# Altium PCB IO板.pcbdoc (part 1 of 2)
Units mil, origin at the board's own origin, x right, y up, seen from the top; angles counter-clockwise.
Board outline 8682.68 x 4967.05 mil, 2 copper layers (Top Layer, Bottom Layer); 114 components, 269 nets, 754 pads, 560 vias.
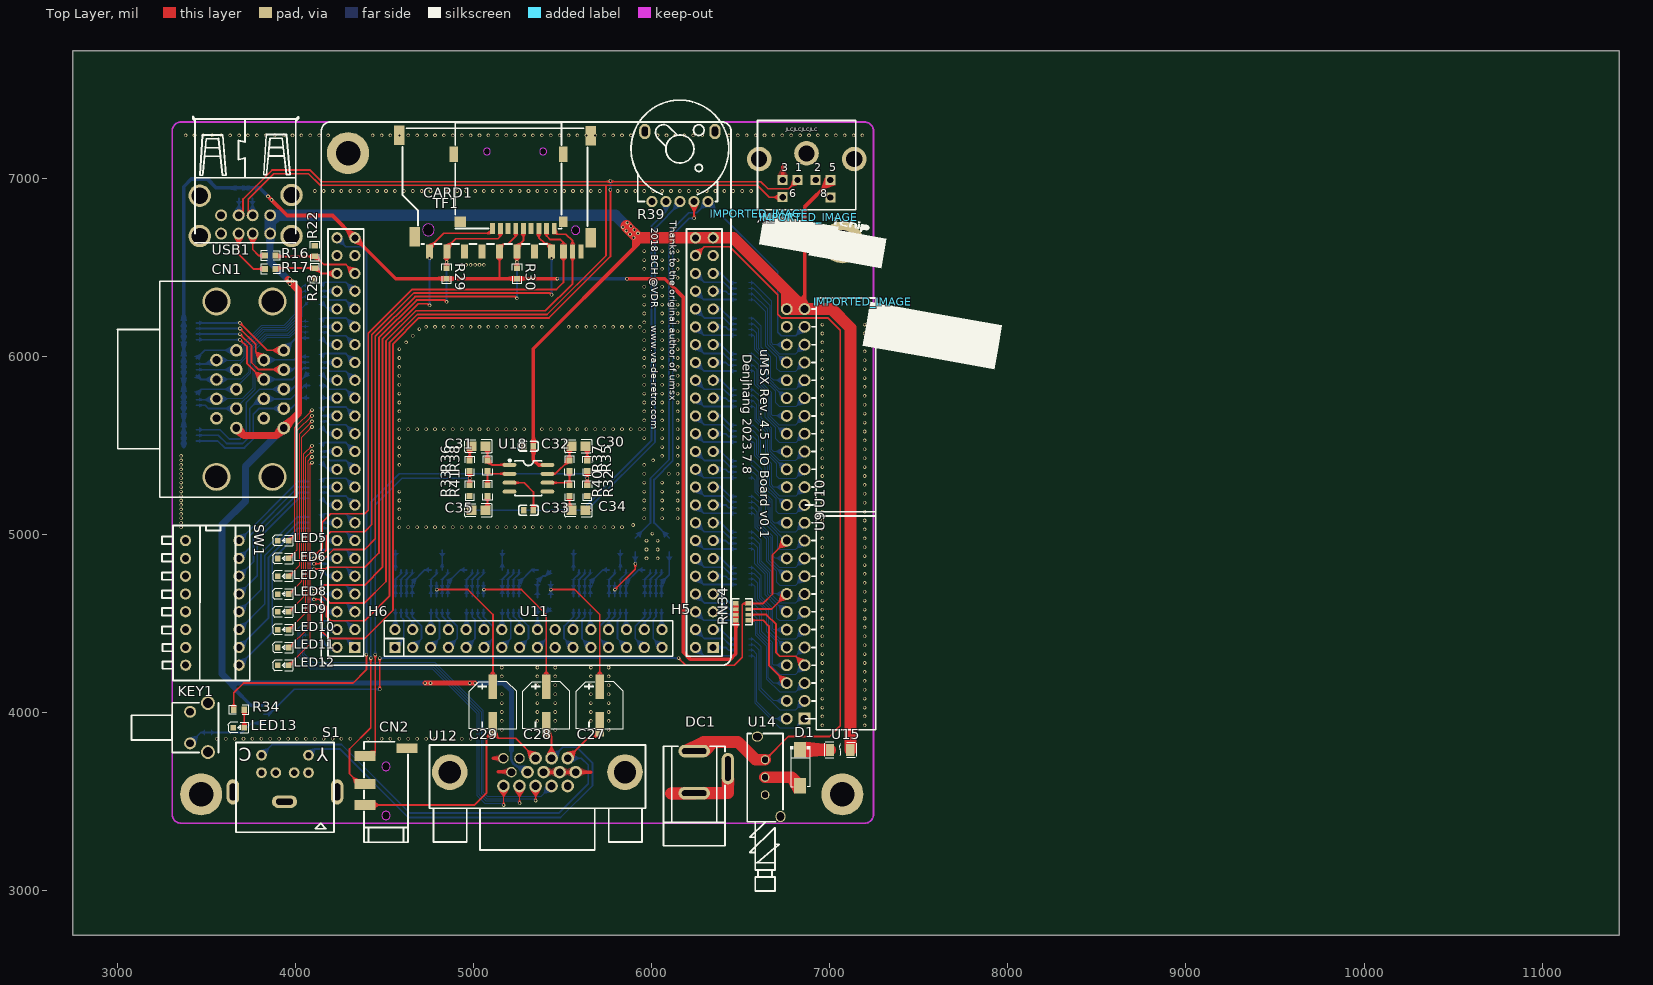
[diagram p0: Top Layer view]
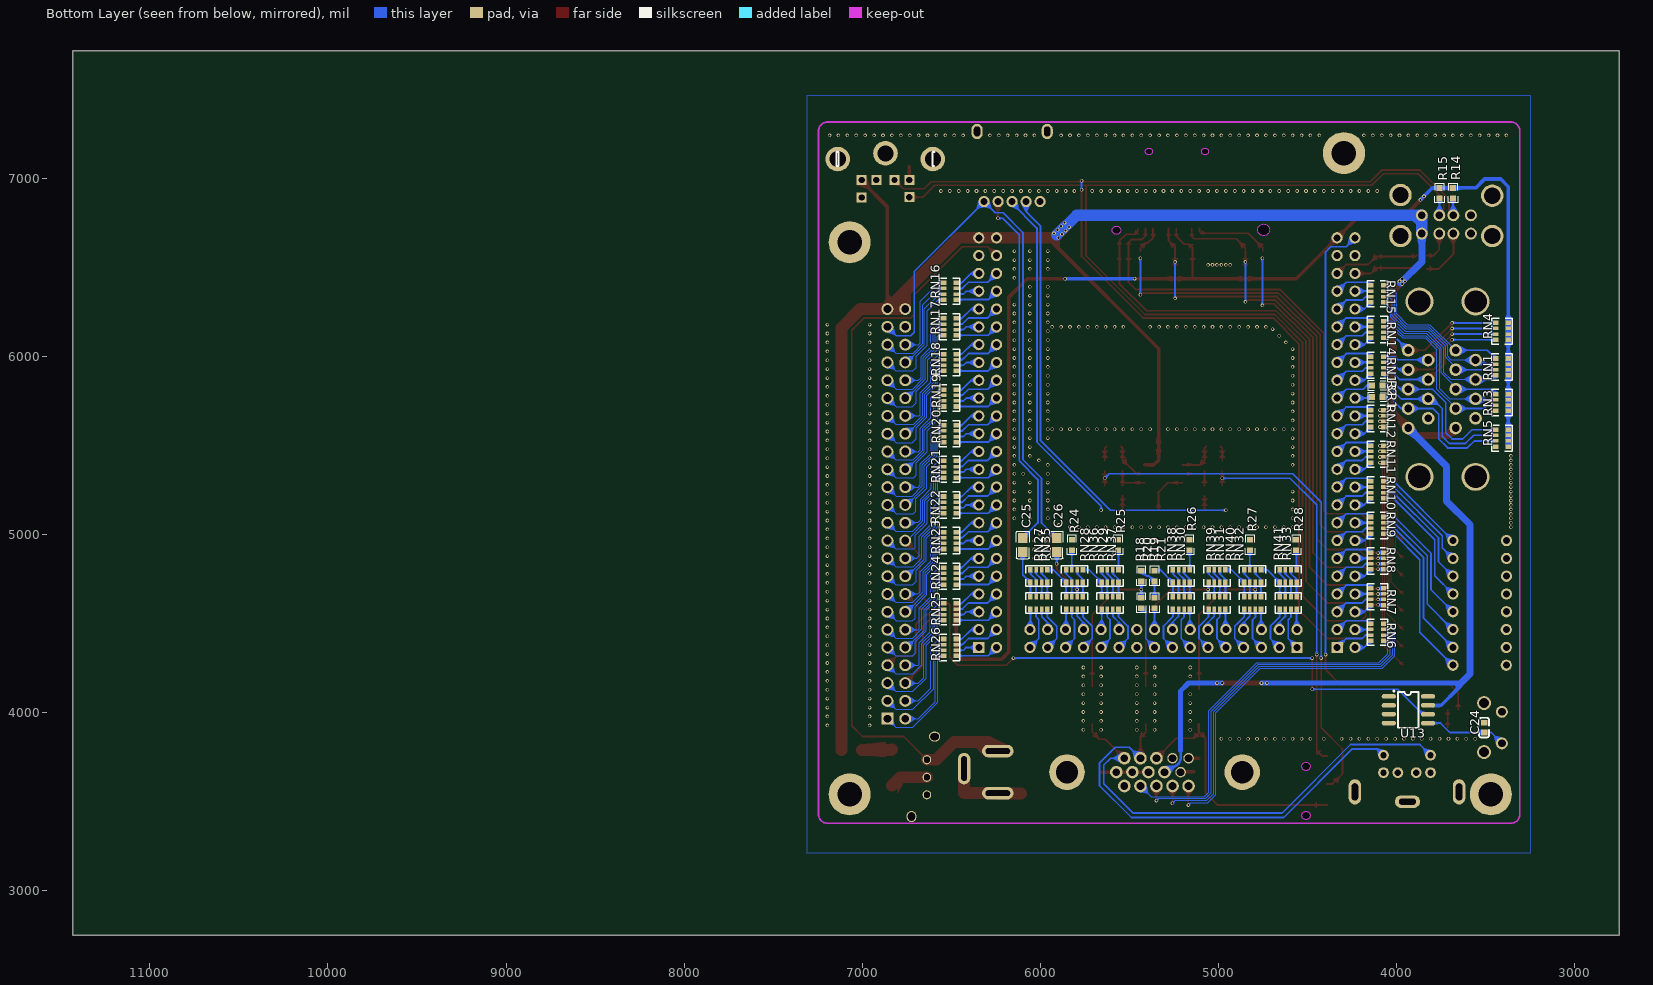
[diagram p1: Bottom Layer view, seen from below]

## Layer stack, top to bottom
Top Layer: signal copper (thickness not stored)
Dielectric: dielectric 12.6, FR-4, Dk 4.8
Bottom Layer: signal copper (thickness not stored)

## Board outline
11432.68,2750 2750,2750 2750,7717.05 11432.68,7717.05

## Components (designator, comment, footprint, x,y, rotation, side; value= is the part's Value field where it differs from the comment)
C24 "UMK107BBJ225KA-T" C0603 3508.66,3917.05 r90 bottom
C25 "CL21A476MQYNNNE" C0805 6098.66,4942.05 r270 bottom
C26 "CL21A476MQYNNNE" C0805 5908.66,4942.05 r270 bottom
C27 "固态电容220uF/10V6.3*5.4" CAP-SMD_BD6.3-L6.6-W6.6-LS7.2-FD 5708.66,4042.05 r270 top
C28 "固态电容220uF/10V6.3*5.4" CAP-SMD_BD6.3-L6.6-W6.6-LS7.2-FD 5408.66,4042.05 r270 top
C29 "固态电容220uF/10V6.3*5.4" CAP-SMD_BD6.3-L6.6-W6.6-LS7.2-FD 5108.66,4042.05 r270 top
C30 "CL21A476MQYNNNE" C0805 5588.66,5497.05 r0 top
C31 "CL21A476MQYNNNE" C0805 5028.66,5497.05 r0 top
C32 "CC0603KRX7R9BB104" C0603 5308.66,5497.05 r0 top
C33 "CC0603KRX7R9BB104" C0603 5308.66,5137.05 r180 top
C34 "CL21A476MQYNNNE" C0805 5588.66,5137.05 r0 top
C35 "CL21A476MQYNNNE" C0805 5028.66,5137.05 r0 top
CARD1 "SD-101" SD-SMD_SD-101 5120.67,6917.05 r180 top
CN1 "HYC33-VGA18A-158" DSUB-TH_HYC33-VGA18A-158 3745.67,5817.05 r270 top
CN2 "PJ-320D_C431535" AUDIO-SMD_PJ-320D 4508.66,3642.05 r180 top
D1 "SS14_C2480" SMA_L4.2-W2.6-LS5.3-RD 6833.66,3692.05 r270 top
DC1 "DC-005" DC-IN-TH_DC-005-A 6333.66,3667.05 r90 top
H5 "X5521FV-2x24-C70D30-1000" HDR-TH_48P-P2.54-V-F-R2-C24-S2.54 6295.67,5517.05 r90 top
H6 "X5521FV-2x24-C70D30-1000" HDR-TH_48P-P2.54-V-F-R2-C24-S2.54 4283.66,5517.05 r90 top
IMPORTED_IMAGE "IMPORTED_IMAGE" IMPORTED_IMAGE 6604.33,6801.85 r0 top
IMPORTED_IMAGE "IMPORTED_IMAGE" IMPORTED_IMAGE 6883.11,6782.51 r0 top
IMPORTED_IMAGE "IMPORTED_IMAGE" IMPORTED_IMAGE 7184.65,6307.05 r0 top
KEY1 "1-1825027-1" KEY-TH_1-1825027-1 3458.66,3917.05 r270 top
LED5 "LED_0603-R" LED_0603 3933.66,4967.05 r0 top
LED6 "LED_0603-R" LED_0603 3933.66,4867.05 r0 top
LED7 "LED_0603-R" LED_0603 3933.66,4767.05 r0 top
LED8 "LED_0603-R" LED_0603 3933.66,4667.05 r0 top
LED9 "LED_0603-R" LED_0603 3933.66,4567.05 r0 top
LED10 "LED_0603-R" LED_0603 3933.66,4467.05 r0 top
LED11 "LED_0603-R" LED_0603 3933.66,4367.05 r0 top
LED12 "LED_0603-R" LED_0603 3933.66,4267.05 r0 top
LED13 "LED_0603-R" LED_0603 3683.66,3917.05 r0 top
R1 "Res_0603" R0603 4108.66,5772.05 r0 bottom
R2 "Res_0603" R0603 4108.66,5837.05 r0 bottom
R14 "0603WAF1001T5E" R0603 3683.66,6917.05 r90 bottom
R15 "0603WAF1001T5E" R0603 3758.66,6917.05 r90 bottom
R16 "0603WAF330JT5E" R0603 3858.66,6567.05 r180 top
R17 "0603WAF330JT5E" R0603 3858.66,6492.05 r180 top
R18 "Res_0603" R0603 5433.66,4617.05 r90 bottom
R19 "Res_0603" R0603 5358.66,4617.05 r90 bottom
R20 "Res_0603" R0603 5433.66,4767.05 r90 bottom
R21 "Res_0603" R0603 5358.66,4767.05 r90 bottom
R22 "0603WAF1502T5E" R0603 4108.66,6592.05 r270 top
R23 "0603WAF1502T5E" R0603 4108.66,6467.05 r90 top
R24 "0603WAF1000T5E" R0603 5823.66,4942.05 r90 bottom
R25 "0603WAF1000T5E" R0603 5563.66,4942.05 r90 bottom
R26 "0603WAF1000T5E" R0603 5163.66,4942.05 r90 bottom
R27 "0603WAF1000T5E" R0603 4823.66,4942.05 r90 bottom
R28 "0603WAF1000T5E" R0603 4563.66,4942.05 r90 bottom
R29 "0603WAF1002T5E" R0603 4848.66,6467.05 r270 top
R30 "0603WAF1002T5E" R0603 5243.66,6467.05 r270 top
R32 "0603WAF1002T5E" R0603 5638.66,5247.05 r270 top
R33 "0603WAF1002T5E" R0603 4978.66,5247.05 r270 top
R34 "0603WAF1001T5E" R0603 3683.66,4017.05 r0 top
R35 "0603WAF100JT5E" R0603 5638.66,5387.05 r270 top
R36 "0603WAF100JT5E" R0603 4978.66,5387.05 r270 top
R37 "0603WAF1502T5E" R0603 5538.66,5387.05 r90 top
R38 "0603WAF1502T5E" R0603 5078.66,5387.05 r90 top
R39 "RK10J12E0024" RES-TH_RK10J12E002L 6158.66,7067.05 r0 top
R40 "0603WAF1002T5E" R0603 5538.66,5247.05 r270 top
R41 "0603WAF1002T5E" R0603 5078.66,5247.05 r90 top
RN1 "4D03WGJ0101T5E" RES-ARRAY-SMD_0603-8P-L3.2-W1.6-BL 3408.66,5942.05 r90 bottom
RN3 "4D03WGJ0101T5E" RES-ARRAY-SMD_0603-8P-L3.2-W1.6-BL 3408.66,5742.05 r90 bottom
RN4 "4D03WGJ0101T5E" RES-ARRAY-SMD_0603-8P-L3.2-W1.6-BL 3408.66,6142.05 r270 bottom
RN5 "4D03WGJ0101T5E" RES-ARRAY-SMD_0603-8P-L3.2-W1.6-BL 3408.66,5542.05 r270 bottom
RN6 "4D03WGJ0101T5E" RES-ARRAY-SMD_0603-8P-L3.2-W1.6-BL 4108.66,4452.05 r270 bottom
RN7 "4D03WGJ0101T5E" RES-ARRAY-SMD_0603-8P-L3.2-W1.6-BL 4108.66,4652.05 r270 bottom
RN8 "4D03WGJ0101T5E" RES-ARRAY-SMD_0603-8P-L3.2-W1.6-BL 4108.66,4852.05 r270 bottom
RN9 "4D03WGJ0101T5E" RES-ARRAY-SMD_0603-8P-L3.2-W1.6-BL 4108.66,5052.05 r270 bottom
RN10 "4D03WGJ0101T5E" RES-ARRAY-SMD_0603-8P-L3.2-W1.6-BL 4108.66,5252.05 r270 bottom
RN11 "4D03WGJ0101T5E" RES-ARRAY-SMD_0603-8P-L3.2-W1.6-BL 4108.66,5452.05 r270 bottom
RN12 "4D03WGJ0101T5E" RES-ARRAY-SMD_0603-8P-L3.2-W1.6-BL 4108.66,5652.05 r270 bottom
RN13 "4D03WGJ0101T5E" RES-ARRAY-SMD_0603-8P-L3.2-W1.6-BL 4108.66,5952.05 r270 bottom
RN14 "4D03WGJ0101T5E" RES-ARRAY-SMD_0603-8P-L3.2-W1.6-BL 4108.66,6152.05 r270 bottom
RN15 "4D03WGJ0101T5E" RES-ARRAY-SMD_0603-8P-L3.2-W1.6-BL 4108.66,6352.05 r270 bottom
RN16 "4D03WGJ0101T5E" RES-ARRAY-SMD_0603-8P-L3.2-W1.6-BL 6508.66,6367.05 r90 bottom
RN17 "4D03WGJ0101T5E" RES-ARRAY-SMD_0603-8P-L3.2-W1.6-BL 6508.66,6167.05 r90 bottom
RN18 "4D03WGJ0101T5E" RES-ARRAY-SMD_0603-8P-L3.2-W1.6-BL 6508.66,5967.05 r90 bottom
RN19 "4D03WGJ0101T5E" RES-ARRAY-SMD_0603-8P-L3.2-W1.6-BL 6508.66,5767.05 r90 bottom
RN20 "4D03WGJ0101T5E" RES-ARRAY-SMD_0603-8P-L3.2-W1.6-BL 6508.66,5567.05 r90 bottom
RN21 "4D03WGJ0101T5E" RES-ARRAY-SMD_0603-8P-L3.2-W1.6-BL 6508.66,5367.05 r90 bottom
RN22 "4D03WGJ0101T5E" RES-ARRAY-SMD_0603-8P-L3.2-W1.6-BL 6508.66,5167.05 r90 bottom
RN23 "4D03WGJ0101T5E" RES-ARRAY-SMD_0603-8P-L3.2-W1.6-BL 6508.66,4967.05 r90 bottom
RN24 "4D03WGJ0101T5E" RES-ARRAY-SMD_0603-8P-L3.2-W1.6-BL 6508.66,4767.05 r90 bottom
RN25 "4D03WGJ0101T5E" RES-ARRAY-SMD_0603-8P-L3.2-W1.6-BL 6508.66,4567.05 r90 bottom
RN26 "4D03WGJ0101T5E" RES-ARRAY-SMD_0603-8P-L3.2-W1.6-BL 6508.66,4367.05 r90 bottom
RN27 "4D03WGJ0101T5E" RES-ARRAY-SMD_0603-8P-L3.2-W1.6-BL 6008.66,4617.05 r180 bottom
RN28 "4D03WGJ0101T5E" RES-ARRAY-SMD_0603-8P-L3.2-W1.6-BL 5808.66,4617.05 r180 bottom
RN29 "4D03WGJ0101T5E" RES-ARRAY-SMD_0603-8P-L3.2-W1.6-BL 5608.66,4617.05 r180 bottom
RN30 "4D03WGJ0101T5E" RES-ARRAY-SMD_0603-8P-L3.2-W1.6-BL 5208.66,4617.05 r180 bottom
RN31 "4D03WGJ0101T5E" RES-ARRAY-SMD_0603-8P-L3.2-W1.6-BL 5008.66,4617.05 r180 bottom
RN32 "4D03WGJ0101T5E" RES-ARRAY-SMD_0603-8P-L3.2-W1.6-BL 4808.66,4617.05 r180 bottom
RN33 "4D03WGJ0101T5E" RES-ARRAY-SMD_0603-8P-L3.2-W1.6-BL 4608.66,4617.05 r180 bottom
RN34 "4D03WGJ0101T5E" RES-ARRAY-SMD_0603-8P-L3.2-W1.6-BL 6508.66,4567.05 r90 top
RN35 "4D03WGJ0101T5E" RES-ARRAY-SMD_0603-8P-L3.2-W1.6-BL 6008.66,4767.05 r180 bottom
RN36 "4D03WGJ0101T5E" RES-ARRAY-SMD_0603-8P-L3.2-W1.6-BL 5808.66,4767.05 r180 bottom
RN37 "4D03WGJ0101T5E" RES-ARRAY-SMD_0603-8P-L3.2-W1.6-BL 5608.66,4767.05 r180 bottom
RN38 "4D03WGJ0101T5E" RES-ARRAY-SMD_0603-8P-L3.2-W1.6-BL 5208.66,4767.05 r180 bottom
RN39 "4D03WGJ0101T5E" RES-ARRAY-SMD_0603-8P-L3.2-W1.6-BL 5008.66,4767.05 r180 bottom
RN40 "4D03WGJ0101T5E" RES-ARRAY-SMD_0603-8P-L3.2-W1.6-BL 4808.66,4767.05 r180 bottom
RN41 "4D03WGJ0101T5E" RES-ARRAY-SMD_0603-8P-L3.2-W1.6-BL 4608.66,4767.05 r180 bottom
S1 "S端子母座" S端子母座 3933.66,3567.05 r180 top
SW1 "DP-08BP" SW-TH_DP-08XP 3533.66,4617.05 r270 top
TF1 "TF-012" TF-SMD_TF-012 5195.67,6927.05 r180 top
U9 "PM254-2-12-W-8.5" HDR-TH_24P-P2.54-H-F-R2-C12-W8.5 6808.66,4517.05 r90 top
U10 "PM254-2-12-W-8.5" hdr-th_24p-p2.54-h-f-r2-c12-w8.5 6808.66,5717.05 r90 top
U11 "PM254-2-16-Z-8.5" HDR-TH_32P-P2.54-V-F-R2-C16-S2.54 5308.66,4417.05 r0 top
U12 "VGAS-C" DB15-TH_FDB1519-F0DB300U1KA 5358.66,3667.05 r0 top
U13 "M51953BFP" SOP-8_L4.9-W3.8-P1.27-LS6.0-BL 3933.66,4017.05 r270 bottom
U14 "PS-12E051" SW-TH_PS-12E051XX 6658.66,3642.05 r270 top
U15 "PTC1206SMD1206P010TF0.1A/60V" F1206 7058.66,3792.05 r0 top
U18 "TPA6111A2DR" SOIC-8_L5.0-W4.0-P1.27-LS6.0-BL 5308.66,5317.05 r270 top
USB1 "907-111A1022D10200" USB-A-TH_USB-M-51 3720.67,6792.05 r180 top
X1 "MINI_DIN_6" M_DIN6 6870.67,7017.05 r0 top

## Footprints (in the part's own frame and the unit in brackets; to place one, negate y for a bottom-side part, rotate by r counter-clockwise, add the part's x,y. Pads: shape width x height; smd on the part's side, far side on the other; paste and mask are expansions set on the pad)
AUDIO-SMD_PJ-320D [mm]
  rect 3x1.4 smd: 1(-3,-4.05) 2(3,4.05) 3(3,1.05) 4(3,-2.95)
  Multi-Layer board cut-out: -0.6,-1.45 -0.518,-1.749 -0.299,-1.967 0,-2.046 0.299,-1.967 0.518,-1.749 0.6,-1.45 0.6,-1.45 0.518,-1.152 0.299,-0.934 0,-0.854 -0.299,-0.934 -0.518,-1.152 -0.6,-1.45
  Multi-Layer board cut-out: -0.6,5.55 -0.518,5.251 -0.299,5.033 0,4.954 0.299,5.033 0.518,5.251 0.6,5.55 0.6,5.55 0.518,5.848 0.299,6.066 0,6.146 -0.299,6.066 -0.518,5.848 -0.6,5.55
  Multi-Layer keep-out region: -0.6,-1.45 -0.518,-1.749 -0.299,-1.967 0,-2.046 0.299,-1.967 0.518,-1.749 0.6,-1.45 0.6,-1.45 0.518,-1.152 0.299,-0.934 0,-0.854 -0.299,-0.934 -0.518,-1.152 -0.6,-1.45
  Multi-Layer keep-out region: -0.6,5.55 -0.518,5.251 -0.299,5.033 0,4.954 0.299,5.033 0.518,5.251 0.6,5.55 0.6,5.55 0.518,5.848 0.299,6.066 0,6.146 -0.299,6.066 -0.518,5.848 -0.6,5.55
  silkscreen extent -3.12,-4.98 3.13,9.37
C0603 [mm]
  rect 0.8x0.9 smd: 1(-0.7,0) 2(0.7,0)
  silkscreen extent -1.41,-0.71 1.39,0.72
C0805 [mm]
  rect 1.41x1.35 smd: 1(-1,0) 2(1,0)
  silkscreen extent -1.96,-0.9 1.96,0.9
CAP-SMD_BD6.3-L6.6-W6.6-LS7.2-FD [mm]
  rect 3.5x1.2 smd: 1(-2.67,0) 2(2.67,0)
  silkscreen extent -3.38,-3.38 3.38,3.38
DB15-TH_FDB1519-F0DB300U1KA [mm]
  round 5.08 hole 3.2: 0(-12.495,0) 0(12.495,0)
  round 1.8 hole 1.1: 1(4.315,1.98) 2(2.025,1.98) 3(-0.265,1.98) 6(5.46,0) 7(3.17,0) 8(0.88,0) 9(-1.41,0) 11(4.315,-1.98) 12(2.025,-1.98) 13(-0.265,-1.98) 14(-2.555,-1.98) 15(-4.845,-1.98)
  round 1.5 hole 1.1: 4(-2.555,1.98) 5(-4.845,1.98) 10(-3.7,0)
  silkscreen extent -15.4,-11.1 15.4,3.85
DC-IN-TH_DC-005-A [mm]
  oval 1.8x4.5 hole 0.8 slot 3.5 at 90 deg: 1(3,2.4) 2(-3,2.4)
  oval 4.5x1.8 hole 0.8 slot 3.5 at 0 deg: 3(0.5,-2.4)
  silkscreen extent -10.5,-2 3.7,6.8
DSUB-TH_HYC33-VGA18A-158 [mm]
  round 1.8 hole 1.1: 1(-5.54,-1.96) 2(-2.77,-1.96) 3(0,-1.96) 4(2.77,-1.96) 5(5.54,-1.96) 6(-4.155,-4.8) 7(-1.385,-4.8) 8(1.385,-4.8) 9(4.155,-4.8) 10(-5.54,4.8) 11(-2.77,4.8) 12(0,4.8) 13(2.77,4.8) 14(5.54,4.8) 15(-4.155,1.96) 16(-1.385,1.96) 17(1.385,1.96) 18(4.155,1.96)
  round 4 hole 3.2: 19(-12.5,3.2) 20(12.5,3.2) 21(-12.5,-4.8) 22(12.5,-4.8)
  silkscreen extent -15.4,-18.9 15.4,6.6
F1206 [mm]
  rect 1.19x1.728 smd: 1(-1.445,0) 2(1.445,0)
  silkscreen extent -2.27,-1.09 2.27,1.09
HDR-TH_24P-P2.54-H-F-R2-C12-W8.5 [mm]
  rect 1.7x1.7 hole 1.1: 1(-13.97,-1.27)
  round 1.7 hole 1.1: 2(-13.97,1.27) 3(-11.43,-1.27) 4(-11.43,1.27) 5(-8.89,-1.27) 6(-8.89,1.27) 7(-6.35,-1.27) 8(-6.35,1.27) 9(-3.81,-1.27) 10(-3.81,1.27) 11(-1.27,-1.27) 12(-1.27,1.27) 13(1.27,-1.27) 14(1.27,1.27) 15(3.81,-1.27) 16(3.81,1.27) 17(6.35,-1.27) 18(6.35,1.27) 19(8.89,-1.27) 20(8.89,1.27) 21(11.43,-1.27) 22(11.43,1.27) 23(13.97,-1.27) 24(13.97,1.27)
  silkscreen extent -15.54,-11.43 15.54,-1.4
hdr-th_24p-p2.54-h-f-r2-c12-w8.5 [mm]
  round 1.7 hole 1.1: 1(-13.97,-1.27) 2(-13.97,1.27) 3(-11.43,-1.27) 4(-11.43,1.27) 5(-8.89,-1.27) 6(-8.89,1.27) 7(-6.35,-1.27) 8(-6.35,1.27) 9(-3.81,-1.27) 10(-3.81,1.27) 11(-1.27,-1.27) 12(-1.27,1.27) 13(1.27,-1.27) 14(1.27,1.27) 15(3.81,-1.27) 16(3.81,1.27) 17(6.35,-1.27) 18(6.35,1.27) 19(8.89,-1.27) 20(8.89,1.27) 21(11.43,-1.27) 22(11.43,1.27) 23(13.97,-1.27) 24(13.97,1.27)
  silkscreen extent -15.54,-11.43 15.54,-1.4
HDR-TH_32P-P2.54-V-F-R2-C16-S2.54 [mm]
  rect 1.6x1.6 hole 1: 1(-19.05,-1.27)
  round 1.6 hole 1: 2(-19.05,1.27) 3(-16.51,-1.27) 4(-16.51,1.27) 5(-13.97,-1.27) 6(-13.97,1.27) 7(-11.43,-1.27) 8(-11.43,1.27) 9(-8.89,-1.27) 10(-8.89,1.27) 11(-6.35,-1.27) 12(-6.35,1.27) 13(-3.81,-1.27) 14(-3.81,1.27) 15(-1.27,-1.27) 16(-1.27,1.27) 17(1.27,-1.27) 18(1.27,1.27) 19(3.81,-1.27) 20(3.81,1.27) 21(6.35,-1.27) 22(6.35,1.27) 23(8.89,-1.27) 24(8.89,1.27) 25(11.43,-1.27) 26(11.43,1.27) 27(13.97,-1.27) 28(13.97,1.27) 29(16.51,-1.27) 30(16.51,1.27) 31(19.05,-1.27) 32(19.05,1.27)
  silkscreen extent -20.57,-2.54 20.57,2.54
HDR-TH_48P-P2.54-V-F-R2-C24-S2.54 [mm]
  rect 1.6x1.6 hole 1: 1(-29.21,-1.27)
  round 1.6 hole 1: 2(-29.21,1.27) 3(-26.67,-1.27) 4(-26.67,1.27) 5(-24.13,-1.27) 6(-24.13,1.27) 7(-21.59,-1.27) 8(-21.59,1.27) 9(-19.05,-1.27) 10(-19.05,1.27) 11(-16.51,-1.27) 12(-16.51,1.27) 13(-13.97,-1.27) 14(-13.97,1.27) 15(-11.43,-1.27) 16(-11.43,1.27) 17(-8.89,-1.27) 18(-8.89,1.27) 19(-6.35,-1.27) 20(-6.35,1.27) 21(-3.81,-1.27) 22(-3.81,1.27) 23(-1.27,-1.27) 24(-1.27,1.27) 25(1.27,-1.27) 26(1.27,1.27) 27(3.81,-1.27) 28(3.81,1.27) 29(6.35,-1.27) 30(6.35,1.27) 31(8.89,-1.27) 32(8.89,1.27) 33(11.43,-1.27) 34(11.43,1.27) 35(13.97,-1.27) 36(13.97,1.27) 37(16.51,-1.27) 38(16.51,1.27) 39(19.05,-1.27) 40(19.05,1.27) 41(21.59,-1.27) 42(21.59,1.27) 43(24.13,-1.27) 44(24.13,1.27) 45(26.67,-1.27) 46(26.67,1.27) 47(29.21,-1.27) 48(29.21,1.27)
  silkscreen extent -30.48,-2.54 30.48,2.54
IMPORTED_IMAGE [mil]
  silkscreen extent 0,-271 635,0
KEY-TH_1-1825027-1 [mm]
  round 2 hole 1.4: 0(-3.5,1.27) 0(3.5,1.27)
  round 1.7 hole 1.1: 1(-2.25,-1.27) 2(2.25,-1.27)
  silkscreen extent -3.56,-9.63 3.56,2.79
LED_0603 [mil]
  rect 31.5x31.5 smd: 1(-33.5,-0.4) 2(29.5,-0.2)
  silkscreen extent -61,-30 53,30
M_DIN6 [mil]
  rect 56x56 hole 35.4: 1(-52,-26) 2(50,-26) 3(-135,-26) 5(133,-26) 6(-135,-122) 8(133,-124)
  round 137.8 hole 90.6: SH1(267,92) SH2(-1,124) SH3(-267,92)
  silkscreen extent -277,-193 275,309
R0603 [mil]
  rect 31.75x34.02 smd: 1(-29.66,0) 2(29.66,0)
  silkscreen extent -55,-26 55,26
RES-ARRAY-SMD_0603-8P-L3.2-W1.6-BL [mm]
  rect 0.65x0.8 smd: 1(-1.2,-0.9) 4(1.2,-0.9) 5(1.2,0.9) 8(-1.2,0.9)
  rect 0.5x0.8 smd: 2(-0.4,-0.9) 3(0.4,-0.9) 6(0.4,0.9) 7(-0.4,0.9)
  silkscreen extent -1.87,-1.45 1.87,1.47
RES-TH_RK10J12E002L [mm]
  round 1.6 hole 1: 1(-4,-5) 2(0,-5) 3(2,-5) 4(-2,-5) 5(4,-5)
  oval 1.6x2.2 hole 0.9 slot 1.4 at 90 deg: 6(5,5) 7(-5,5)
  silkscreen extent -6.96,-5 6.96,9.46
SD-SMD_SD-101 [mm]
  rect 1x2 smd: 1(6.87,8.275) 2(4.37,8.275) 3(1.87,8.275) 4(-0.63,8.275) 5(-3.13,8.275) 6(-5.63,8.275) 7(-8.06,8.275) 8(-9.76,8.275) 9(9.37,8.275)
  rect 0.7x2 smd: 10(-11.06,8.275) 11(-12.26,8.275)
  rect 1.5x2.8 smd: 12(-13.65,6.325) 13(-13.65,-8.175) 14(13.65,-8.275) 15(11.45,6.225)
  Multi-Layer board cut-out: 8.65,5.225 8.766,4.803 9.077,4.494 9.5,4.382 9.923,4.494 10.234,4.803 10.35,5.225 10.35,5.225 10.234,5.647 9.923,5.956 9.5,6.068 9.077,5.956 8.766,5.647 8.65,5.225
  Multi-Layer board cut-out: -12.1,5.275 -12.041,5.015 -11.874,4.806 -11.634,4.69 -11.367,4.69 -11.126,4.806 -10.959,5.014 -10.9,5.275 -10.9,5.275 -10.959,5.535 -11.126,5.744 -11.366,5.86 -11.633,5.86 -11.874,5.744 -12.041,5.535 -12.1,5.275
  Multi-Layer keep-out region: 8.65,5.225 8.766,4.803 9.077,4.494 9.5,4.382 9.923,4.494 10.234,4.803 10.35,5.225 10.35,5.225 10.234,5.647 9.923,5.956 9.5,6.068 9.077,5.956 8.766,5.647 8.65,5.225
  Multi-Layer keep-out region: -12.1,5.275 -12.041,5.015 -11.874,4.806 -11.634,4.69 -11.367,4.69 -11.126,4.806 -10.959,5.014 -10.9,5.275 -10.9,5.275 -10.959,5.535 -11.126,5.744 -11.366,5.86 -11.633,5.86 -11.874,5.744 -12.041,5.535 -12.1,5.275
  silkscreen extent -13.2,-9.27 13.2,7.23
SMA_L4.2-W2.6-LS5.3-RD [mm]
  rect 2.2x1.7 smd: 1(-2.565,0) 2(2.565,0)
  silkscreen extent -3.08,-1.44 2.7,1.44
SOIC-8_L5.0-W4.0-P1.27-LS6.0-BL [mil]
  oval 22.38x76.78 smd: 1(-75,-106.5) 2(-25,-106.5) 3(25,-106.5) 4(75,-106.5) 5(75,106.5) 6(25,106.5) 7(-25,106.5) 8(-75,106.5)
  silkscreen extent -106,-111 98,75
SOP-8_L4.9-W3.8-P1.27-LS6.0-BL [mil]
  oval 25.59x80 smd: 1(-75,-110.08) 2(-25,-110.08) 3(25,-110.08) 4(75,-110.08) 5(75,110.08) 6(25,110.08) 7(-25,110.08) 8(-75,110.08)
  silkscreen extent -108,-85 101,57
SW-TH_DP-08XP [mm]
  round 1.6 hole 1: 1(-8.887,-3.823) 2(-6.347,-3.823) 3(-3.807,-3.823) 4(-1.267,-3.823) 5(1.26,-3.818) 6(3.807,-3.797) 7(6.347,-3.797) 8(8.887,-3.797) 9(8.887,3.823) 10(6.347,3.823) 11(3.807,3.823) 12(1.26,3.802) 13(-1.267,3.797) 14(-3.807,3.797) 15(-6.347,3.797) 16(-8.887,3.797)
  silkscreen extent -11.05,-7.19 11.06,5.34
SW-TH_PS-12E051XX [mm]
  oval 1.3x1.2 hole 0.8 slot 0.9 at 0 deg: 1(-2.4,-0.55) 2(0.1,-0.55) 3(2.6,-0.55)
  oval 1.4x1.6 hole 1 slot 1.2 at 90 deg: 4(-5.7,-1.65)
  oval 1.6x1.4 hole 1 slot 1.2 at 0 deg: 4(5.7,1.65)
  silkscreen extent -6.13,-3.1 16.31,2
S端子母座 [mil]
  round 60 hole 36 copper offset -0.01,0.01: 1(43.36,-97.28) 2(-59,-97.28)
  round 60 hole 36: 3(124.07,-97.28) 4(-139.71,-97.28) 5(124.07,-195.31) 6(-139.71,-195.31)
  oval 70.87x141.73 hole 35.43 slot 94.49 at 90 deg: 7(284.48,10.79) 9(-300.52,10.79)
  oval 141.73x70.87 hole 35.43 slot 94.49 at 0 deg: 8(-5.25,65.91)
  silkscreen extent -283,-266 268,238
TF-SMD_TF-012 [mm]
  rect 0.7x1.6 smd: 1(2.25,5.3) 2(1.15,5.3) 3(0.05,5.3) 4(-1.05,5.3) 5(-2.15,5.3) 6(-3.25,5.3) 7(-4.35,5.3) 8(-5.45,5.3) CD(-6.55,5.3)
  rect 1.2x1.5 smd: 10(-7.8,4.3)
  rect 1.2x2.2 smd: 11(-7.8,-5.3) 12(7.8,-5.3)
  rect 1.6x1.5 smd: 13(6.85,4.3)
  Multi-Layer board cut-out: -5.45,-5.7 -5.38,-5.947 -5.198,-6.126 -4.95,-6.192 -4.702,-6.126 -4.52,-5.947 -4.45,-5.7 -4.45,-5.7 -4.52,-5.453 -4.702,-5.274 -4.95,-5.208 -5.198,-5.274 -5.38,-5.453 -5.45,-5.7
  Multi-Layer board cut-out: 2.55,-5.7 2.62,-5.947 2.802,-6.126 3.05,-6.192 3.298,-6.126 3.48,-5.947 3.55,-5.7 3.55,-5.7 3.48,-5.453 3.298,-5.274 3.05,-5.208 2.802,-5.274 2.62,-5.453 2.55,-5.7
  Multi-Layer keep-out region: -5.45,-5.7 -5.38,-5.947 -5.198,-6.126 -4.95,-6.192 -4.702,-6.126 -4.52,-5.947 -4.45,-5.7 -4.45,-5.7 -4.52,-5.453 -4.702,-5.274 -4.95,-5.208 -5.198,-5.274 -5.38,-5.453 -5.45,-5.7
  Multi-Layer keep-out region: 2.55,-5.7 2.62,-5.947 2.802,-6.126 3.05,-6.192 3.298,-6.126 3.48,-5.947 3.55,-5.7 3.55,-5.7 3.48,-5.453 3.298,-5.274 3.05,-5.208 2.802,-5.274 2.62,-5.453 2.55,-5.7
  silkscreen extent -7.58,-9.83 7.57,5.31
USB-A-TH_USB-M-51 [mm]
  round 1.7 hole 1.1: 1(-3.5,2.574) 2(-1.001,2.574) 3(1.001,2.574) 4(3.5,2.574) 5(-3.5,-0.027) 6(-1.001,-0.027) 7(1.001,-0.027) 8(3.5,-0.027)
  round 3.2 hole 2.3: 9(-6.551,-2.925) 9(-6.551,2.925) 9(6.551,-2.826) 9(6.551,2.925)
  silkscreen extent -7.52,-14.13 7.54,3.87

## Free pads (board coordinates)
  round 236.22 hole 137.8: 1(3470.67,3542.05) 1(4295.67,7142.05) 1(7070.67,3542.05) 1(7070.67,6642.05)

## Via types
v1: diameter 20, hole 12, Top Layer to Bottom Layer, 560 vias

## Nets (pads, with @x,y where several pads share a name; then routed paths per layer and width w, separated by ;. In a path a pad name is that pad's centre, name@x,y a point inside that pad or via, vN(x,y) a via of type N, cw(c..) or ccw(c..) an arc to the next point about the centre after c; other vN are vias at no path point)
5V-IN: DC1.1 H5.46 U14.1 | length 4405.6
  Top Layer w10: H5.46@6245.67,6567.05 6295.67,6617.05 6438.66,6617.05 6708.66,6347.05 6708.66,6237.05 6728.66,6217.05 6988.66,6217.05 7058.66,6147.05 7058.66,3927.05 6998.66,3867.05 6767.52,3867.05 U14.1@6637.01,3736.53
  Top Layer w66.93: U14.1@6637.01,3736.53 6584.18,3736.53 6483.66,3837.05 6348.96,3837.05 ; 6348.96,3837.05 6297.07,3785.16 DC1.1@6239.17,3785.16 6291.06,3837.05 6348.96,3837.05
$4N317: LED13.2 R34.2 | length 100.3
  Top Layer w10: LED13.2@3713.16,3916.85 3713.16,4016.89 R34.2@3713.32,4017.05
$4N8313: R16.2 USB1.2 | length 172.7
  Top Layer w10: USB1.2@3760.07,6690.7 3760.07,6600.98 3794,6567.05 R16.2@3829,6567.05
$4N8314: R17.2 USB1.3 | length 297.9
  Top Layer w10: USB1.3@3681.27,6690.7 3681.27,6574.78 3764,6492.05 R17.2@3829,6492.05
$4N8492: C24.1 KEY1.2 U13.5 | length 462
  Bottom Layer w10: KEY1.2@3408.66,3828.47 3469.68,3889.49 C24.1@3508.66,3889.49 3701.02,3889.49 3753.58,3942.05 U13.5@3823.58,3942.05
$4N8660: D1.2 U14.2 | length 216.1
  Top Layer w66.93: U14.2@6637.01,3638.11 6786.6,3638.11 D1.2@6833.66,3591.05
$4N8663: D1.1 U15.1 | length 168.5
  Top Layer w66.93: D1.1@6833.66,3793.05 6834.66,3792.05 U15.1@7001.77,3792.05
$4N10687: C26.2 RN28.6 RN36.3 | length 337.4
  Top Layer w10: v1(5793.66,4692.05) 5908.66,4807.05 v1(5908.66,4837.05)
  Bottom Layer w10: RN28.6@5792.91,4652.48 RN36.3@5792.91,4731.61 ; v1(5908.66,4837.05) C26.2@5908.66,4902.68
$4N10692: C25.2 RN27.8 RN35.1 | length 267.9
  Bottom Layer w10: RN27.8@6055.9,4652.48 RN35.1@6055.9,4731.61 6098.66,4774.37 C25.2@6098.66,4902.68
$4N10755: R24.1 RN36.7 | length 110.2
  Bottom Layer w10: R24.1@5823.66,4912.39 5824.41,4911.64 RN36.7@5824.41,4802.48
$4N10758: R25.1 RN37.5 | length 110.8
  Bottom Layer w10: RN37.5@5561.42,4802.48 5561.42,4910.15 R25.1@5563.66,4912.39
$4N10767: C35.2 R41.1 | length 84.7
  Top Layer w10: C35.2@5068.03,5137.05 5078.66,5147.68 R41.1@5078.66,5217.39
$4N10768: C33.1 U18.3 | length 258.3
  Top Layer w10: U18.3@5202.05,5291.94 5283.77,5291.94 5336.11,5239.59 5336.11,5137.15 C33.1@5336.22,5137.05
$4N10775: CN2.4 R33.1 R36.2 | length 2123.3
  Top Layer w10: CN2.4@4390.55,3758.19 4420.55,3758.19 4448.66,3786.3 v1(4448.66,4327.05) ; R33.1@4978.66,5276.71 v1(4978.66,5317.05) R36.2@4978.66,5357.39
  Bottom Layer w10: v1(4448.66,4327.05) 4448.66,5167.05 4598.66,5317.05 v1(4978.66,5317.05)
$4N10776: CN2.3 R32.1 R35.2 | length 3056.9
  Top Layer w10: CN2.3@4390.55,3600.71 4360.55,3600.71 4303.66,3657.6 4303.66,3797.05 4423.66,3917.05 v1(4423.66,4307.05) ; R32.1@5638.66,5276.71 v1(5638.66,5317.05) R35.2@5638.66,5357.39
  Bottom Layer w10: v1(4423.66,4307.05) 4423.66,5182.05 4583.66,5342.05 5613.66,5342.05 v1(5638.66,5317.05)
$4N10777: C31.1 R36.1 | length 84.7
  Top Layer w10: R36.1@4978.66,5416.71 4978.66,5486.42 C31.1@4989.29,5497.05
$4N10778: C30.2 R35.1 | length 84.7
  Top Layer w10: C30.2@5628.03,5497.05 5638.66,5486.42 R35.1@5638.66,5416.71
$4N10779: C31.2 R38.2 U18.1 | length 218.5
  Top Layer w10: C31.2@5068.03,5497.05 5078.66,5486.42 R38.2@5078.66,5416.71 5103.32,5392.05 U18.1@5202.16,5392.05
$4N10780: R38.1 R41.2 U18.2 | length 204.7
  Top Layer w10: R41.2@5078.66,5276.71 5078.66,5340.68 ; R38.1@5078.66,5357.39 5078.66,5340.68 ; U18.2@5202.16,5342.05 5080.03,5342.05 5078.66,5340.68
$4N10781: C30.1 R37.2 U18.7 | length 239.2
  Top Layer w10: U18.7@5415.16,5342.05 5459,5342.05 5533.66,5416.71 R37.2@5538.66,5416.71 5538.66,5486.42 C30.1@5549.29,5497.05
$4N10782: R37.1 R40.1 U18.6 | length 204.4
  Top Layer w10: U18.6@5415.16,5292.05 5538.24,5292.05 R40.1@5538.66,5292.47 ; R40.1@5538.66,5276.71 R40.1@5538.66,5292.47 ; R37.1@5538.66,5357.39 R40.1@5538.66,5292.47
$4N10785: C35.1 R39.4 | length 2578.4
  Bottom Layer w10: v1(4958.66,5137.05) 5608.66,5137.05 5998.66,5527.05 5998.66,6732.83 6079.92,6814.09 R39.4@6079.92,6870.19
$4N10787: C34.1 R40.2 | length 84.7
  Top Layer w10: R40.2@5538.66,5217.39 5538.66,5147.68 C34.1@5549.29,5137.05
$4N10789: C34.2 R39.2 | length 1940.3
  Bottom Layer w10: v1(5658.66,5137.05) 5658.66,5159.42 6019.66,5520.42 6019.66,6721.2 6158.66,6860.2 R39.2@6158.66,6870.19
$4N11161: RN27.7 RN35.2 RN35.8 | length 163
  Bottom Layer w10: RN27.7@6024.41,4652.48 RN35.2@6024.41,4731.61 6024.41,4749.81 6055.9,4781.3 RN35.8@6055.9,4802.48
$4N11167: RN27.6 RN35.3 RN35.7 | length 163
  Bottom Layer w10: RN27.6@5992.91,4652.48 RN35.3@5992.91,4731.61 5992.92,4749.81 6024.41,4781.3 RN35.7@6024.41,4802.48
$4N11173: RN27.5 RN35.4 RN35.6 | length 163
  Bottom Layer w10: RN27.5@5961.42,4652.48 RN35.4@5961.42,4731.61 5961.42,4749.81 5992.91,4781.3 RN35.6@5992.91,4802.48
$4N11234: RN28.8 RN35.5 RN36.1 | length 214
  Bottom Layer w10: RN28.8@5855.9,4652.48 RN36.1@5855.9,4731.61 5926.77,4802.48 RN35.5@5961.42,4802.48
$4N11240: RN28.7 RN36.2 RN36.8 | length 163
  Bottom Layer w10: RN28.7@5824.41,4652.48 RN36.2@5824.41,4731.61 5824.41,4749.81 5855.9,4781.3 RN36.8@5855.9,4802.48
$4N11246: RN28.5 RN36.4 RN36.6 | length 163
  Bottom Layer w10: RN28.5@5761.42,4652.48 RN36.4@5761.42,4731.61 5761.42,4749.81 5792.91,4781.3 RN36.6@5792.91,4802.48
$4N11293: RN29.8 RN36.5 RN37.1 | length 214
  Bottom Layer w10: RN29.8@5655.9,4652.48 RN37.1@5655.9,4731.61 5726.77,4802.48 RN36.5@5761.42,4802.48
$4N11301: RN29.7 RN37.2 RN37.8 | length 163
  Bottom Layer w10: RN29.7@5624.41,4652.48 RN37.2@5624.41,4731.61 5624.41,4749.81 5655.9,4781.3 RN37.8@5655.9,4802.48
$4N11306: RN29.6 RN37.3 RN37.7 | length 163
  Bottom Layer w10: RN29.6@5592.91,4652.48 RN37.3@5592.91,4731.61 5592.92,4749.81 5624.41,4781.3 RN37.7@5624.41,4802.48
$4N11311: RN29.5 RN37.4 RN37.6 | length 163
  Bottom Layer w10: RN29.5@5561.42,4652.48 RN37.4@5561.42,4731.61 5561.42,4749.81 5592.91,4781.3 RN37.6@5592.91,4802.48
$4N12254: C29.1 RN32.6 RN40.3 | length 872
  Top Layer w10: v1(4793.66,4692.05) 4968.66,4692.05 5108.66,4552.05 C29.1@5108.66,4132.16
  Bottom Layer w10: RN32.6@4792.91,4652.48 RN40.3@4792.91,4731.61
$4N12288: R28.1 RN41.5 | length 110.8
  Bottom Layer w10: RN41.5@4561.42,4802.48 4561.42,4910.15 R28.1@4563.66,4912.39
$4N12294: RN32.5 RN40.4 RN40.6 | length 163
  Bottom Layer w10: RN32.5@4761.42,4652.48 RN40.4@4761.42,4731.61 4761.42,4749.81 4792.91,4781.3 RN40.6@4792.91,4802.48
$4N12299: RN33.8 RN40.5 RN41.1 | length 214
  Bottom Layer w10: RN33.8@4655.9,4652.48 RN41.1@4655.9,4731.61 4726.77,4802.48 RN40.5@4761.42,4802.48
$4N12304: RN33.7 RN41.2 RN41.8 | length 163
  Bottom Layer w10: RN33.7@4624.41,4652.48 RN41.2@4624.41,4731.61 4624.41,4749.81 4655.9,4781.3 RN41.8@4655.9,4802.48
$4N12313: RN33.6 RN41.3 RN41.7 | length 163
  Bottom Layer w10: RN33.6@4592.91,4652.48 RN41.3@4592.91,4731.61 4592.92,4749.81 4624.41,4781.3 RN41.7@4624.41,4802.48
$4N12318: RN33.5 RN41.4 RN41.6 | length 163
  Bottom Layer w10: RN33.5@4561.42,4652.48 RN41.4@4561.42,4731.61 4561.42,4749.81 4592.91,4781.3 RN41.6@4592.91,4802.48
$4N12766: C27.1 R18.2 R20.1 | length 828.5
  Top Layer w10: v1(5433.66,4692.05) 5568.66,4692.05 5708.66,4552.05 C27.1@5708.66,4147.16
  Bottom Layer w10: R18.2@5433.66,4646.71 v1(5433.66,4692.05) R20.1@5433.66,4737.39
$4N12770: R19.2 R20.2 R21.1 | length 190.3
  Bottom Layer w10: R19.2@5358.66,4646.71 R21.1@5358.66,4737.39 5388.66,4767.39 5404.34,4767.39 R20.2@5433.66,4796.71
$4N12775: R21.2 RN30.8 RN38.1 | length 214
  Bottom Layer w10: RN30.8@5255.9,4652.48 RN38.1@5255.9,4731.61 5326.77,4802.48 R21.2@5361.42,4802.48
$4N12780: RN30.7 RN38.2 RN38.8 | length 163
  Bottom Layer w10: RN30.7@5224.41,4652.48 RN38.2@5224.41,4731.61 5224.41,4749.81 5255.9,4781.3 RN38.8@5255.9,4802.48
$4N12785: RN30.6 RN38.3 RN38.7 | length 163
  Bottom Layer w10: RN30.6@5192.91,4652.48 RN38.3@5192.91,4731.61 5192.92,4749.81 5224.41,4781.3 RN38.7@5224.41,4802.48
$4N12790: RN30.5 RN38.4 RN38.6 | length 163
  Bottom Layer w10: RN30.5@5161.42,4652.48 RN38.4@5161.42,4731.61 5161.42,4749.81 5192.91,4781.3 RN38.6@5192.91,4802.48
$4N12834: R26.1 RN38.5 | length 110.8
  Bottom Layer w10: RN38.5@5161.42,4802.48 5161.42,4910.15 R26.1@5163.66,4912.39
$4N23355: R27.1 RN40.7 | length 110.2
  Bottom Layer w10: R27.1@4823.66,4912.39 4824.41,4911.64 RN40.7@4824.41,4802.48
$4N23356: C28.1 RN31.8 RN39.1 | length 892
  Top Layer w10: v1(5058.66,4692.05) 5268.66,4692.05 5408.66,4552.05 C28.1@5408.66,4147.16
  Bottom Layer w10: RN31.8@5055.9,4652.48 RN39.1@5055.9,4731.61
$4N23357: RN31.7 RN39.2 RN39.8 | length 163
  Bottom Layer w10: RN31.7@5024.41,4652.48 RN39.2@5024.41,4731.61 5024.41,4749.81 5055.9,4781.3 RN39.8@5055.9,4802.48
$4N23358: RN31.6 RN39.3 RN39.7 | length 163
  Bottom Layer w10: RN31.6@4992.91,4652.48 RN39.3@4992.91,4731.61 4992.92,4749.81 5024.41,4781.3 RN39.7@5024.41,4802.48
$4N23359: RN31.5 RN39.4 RN39.6 | length 163
  Bottom Layer w10: RN31.5@4961.42,4652.48 RN39.4@4961.42,4731.61 4961.42,4749.81 4992.91,4781.3 RN39.6@4992.91,4802.48
$4N23360: RN32.8 RN39.5 RN40.1 | length 214
  Bottom Layer w10: RN32.8@4855.9,4652.48 RN40.1@4855.9,4731.61 4926.77,4802.48 RN39.5@4961.42,4802.48
$4N23361: RN32.7 RN40.2 RN40.8 | length 163
  Bottom Layer w10: RN32.7@4824.41,4652.48 RN40.2@4824.41,4731.61 4824.41,4749.81 4855.9,4781.3 RN40.8@4855.9,4802.48
A0: RN19.7 U10.6 | length 492.7
  Bottom Layer w6: RN19.7@6544.1,5751.3 6569.41,5751.3 6590.66,5730.05 6590.66,5647.02 6650.66,5587.02 6650.66,5467.02 6750.63,5367.05 U10.6@6758.66,5367.05
A1: RN19.8 U10.5 | length 654.4
  Bottom Layer w6: RN19.8@6544.1,5719.81 6570.9,5719.81 6578.66,5712.05 6578.66,5642.05 6638.66,5582.05 6638.66,5462.05 6699.66,5401.05 6699.66,5331.05 6713.66,5317.05 6808.66,5317.05 U10.5@6858.66,5367.05
A2: RN19.5 U10.8 | length 495.5
  Bottom Layer w6: RN19.5@6544.1,5814.29 6571.42,5814.29 6614.66,5771.05 6614.66,5656.96 6674.66,5596.96 6674.66,5476.96 6684.57,5467.05 U10.8@6758.66,5467.05
A3: RN19.6 U10.7 | length 615.1
  Bottom Layer w6: RN19.6@6544.1,5782.8 6570.94,5782.8 6602.66,5751.08 6602.66,5651.99 6662.66,5591.99 6662.66,5471.99 6717.6,5417.05 6808.66,5417.05 U10.7@6858.66,5467.05
A4: RN18.7 U10.10 | length 495
  Bottom Layer w6: RN18.7@6544.1,5951.3 6569.41,5951.3 6590.66,5930.05 6590.66,5847.02 6650.66,5787.02 6650.66,5663.02 6746.64,5567.05 U10.10@6758.66,5567.05
A5: RN18.8 U10.9 | length 651.5
  Bottom Layer w6: RN18.8@6544.1,5919.81 6570.9,5919.81 6578.66,5912.05 6578.66,5842.05 6638.66,5782.05 6638.66,5658.05 6696.66,5600.05 6696.66,5539.05 6718.66,5517.05 6808.66,5517.05 U10.9@6858.66,5567.05
A6: RN21.5 U9.24 | length 493.8
  Bottom Layer w6: RN21.5@6544.1,5414.29 6571.42,5414.29 6614.66,5371.05 6614.66,5256.96 6674.66,5196.96 6674.66,5079.84 6687.45,5067.05 U9.24@6758.66,5067.05
A7: RN21.6 U9.23 | length 613.8
  Bottom Layer w6: RN21.6@6544.1,5382.8 6571.66,5382.8 6602.66,5351.8 6602.66,5251.99 6662.66,5191.99 6662.66,5074.87 6720.48,5017.05 6808.66,5017.05 U9.23@6858.66,5067.05
A8: RN20.7 U10.2 | length 496.4
  Bottom Layer w6: RN20.7@6544.1,5551.3 6569.41,5551.3 6589.66,5531.05 6589.66,5448.02 6650.66,5387.02 6650.66,5266.56 6754.42,5162.81 U10.2@6758.66,5167.05
A9: RN22.8 U9.17 | length 651.5
  Bottom Layer w6: RN22.8@6544.1,5119.81 6570.9,5119.81 6578.66,5112.05 6578.66,5042.05 6643.66,4977.05 6643.66,4854.93 6700.68,4797.92 6700.68,4735.03 6718.66,4717.05 6808.66,4717.05 U9.17@6858.66,4767.05
A10: RN22.5 U9.20 | length 490.2
  Bottom Layer w6: RN22.5@6544.1,5214.29 6571.42,5214.29 6614.66,5171.05 6614.66,5056.96 6679.66,4991.96 6679.66,4881.05 6693.66,4867.05 U9.20@6758.66,4867.05
A11: RN22.6 U9.19 | length 617.5
  Bottom Layer w6: RN22.6@6544.1,5182.8 6572.91,5182.8 6602.66,5153.05 6602.66,5051.99 6667.66,4986.99 6667.66,4864.87 6715.48,4817.05 6808.66,4817.05 U9.19@6858.66,4867.05
A12: RN20.8 U10.1 | length 654.4
  Bottom Layer w6: RN20.8@6544.1,5519.81 6570.9,5519.81 6577.66,5513.05 6577.66,5443.05 6638.66,5382.05 6638.66,5261.59 6699.66,5200.59 6699.66,5131.05 6713.66,5117.05 6808.66,5117.05 U10.1@6858.66,5167.05
A13: RN20.5 U10.4 | length 494.3
  Bottom Layer w6: RN20.5@6544.1,5614.29 6571.42,5614.29 6613.66,5572.05 6613.66,5457.96 6674.66,5396.96 6674.66,5279.08 6686.69,5267.05 U10.4@6758.66,5267.05
A14: RN20.6 U10.3 | length 613.1
  Bottom Layer w6: RN20.6@6544.1,5582.8 6569.57,5582.8 6601.66,5550.71 6601.66,5452.99 6662.66,5391.99 6662.66,5274.11 6719.72,5217.05 6808.66,5217.05 U10.3@6858.66,5267.05
A15: RN22.7 U9.18 | length 498.1
  Bottom Layer w6: RN22.7@6544.1,5151.3 6569.41,5151.3 6590.66,5130.05 6590.66,5047.02 6655.66,4982.02 6655.66,4859.9 6753.59,4761.97 U9.18@6758.66,4767.05
BDIR: RN24.6 U9.11 | length 615.6
  Bottom Layer w6: RN24.6@6544.1,4782.8 6572.91,4782.8 6603.69,4752.02 6603.69,4645.96 6667.66,4581.99 6667.66,4468.05 6718.66,4417.05 6808.66,4417.05 U9.11@6858.66,4467.05
CLOCK: RN21.8 U9.21 | length 652.5
  Bottom Layer w6: RN21.8@6544.1,5319.81 6567.66,5319.81 6578.66,5308.81 6578.66,5242.05 6638.66,5182.05 6638.66,5061.59 6705.69,4994.56 6705.69,4925.02 6713.66,4917.05 6808.66,4917.05 U9.21@6858.66,4967.05
CS1: RN26.7 U9.2 | length 530.7
  Bottom Layer w6: RN26.7@6544.1,4351.3 6569.41,4351.3 6590.66,4330.05 6590.66,4062.02 6685.63,3967.05 U9.2@6758.66,3967.05
CS2: RN26.6 U9.3 | length 615.6
  Bottom Layer w6: RN26.6@6544.1,4382.8 6572.91,4382.8 6602.66,4353.05 6602.66,4133.05 6718.66,4017.05 6808.66,4017.05 U9.3@6858.66,4067.05
CS12: RN26.5 U9.4 | length 494.9
  Bottom Layer w6: RN26.5@6544.1,4414.29 6571.42,4414.29 6614.66,4371.05 6614.66,4138.02 6685.63,4067.05 U9.4@6758.66,4067.05
D0: RN18.5 U10.12 | length 497.8
  Bottom Layer w6: RN18.5@6544.1,6014.29 6571.42,6014.29 6614.66,5971.05 6614.66,5856.96 6674.66,5796.96 6674.66,5673.05 6680.66,5667.05 U10.12@6758.66,5667.05
D1: RN18.6 U10.11 | length 618.6
  Bottom Layer w6: RN18.6@6544.1,5982.8 6572.91,5982.8 6602.66,5953.05 6602.66,5851.99 6662.66,5791.99 6662.66,5667.99 6713.61,5617.05 6808.66,5617.05 U10.11@6858.66,5667.05
D2: RN17.7 U10.14 | length 492.7
  Bottom Layer w6: RN17.7@6544.1,6151.3 6569.41,6151.3 6590.66,6130.05 6590.66,6043.08 6645.66,5988.08 6645.66,5872.02 6750.63,5767.05 U10.14@6758.66,5767.05
D3: RN17.8 U10.13 | length 651.5
  Bottom Layer w6: RN17.8@6544.1,6119.81 6570.9,6119.81 6578.66,6112.05 6578.66,6037.05 6633.66,5982.05 6633.66,5867.05 6695.66,5805.05 6695.66,5740.05 6718.66,5717.05 6808.66,5717.05 U10.13@6858.66,5767.05
D4: RN17.5 U10.16 | length 495.5
  Bottom Layer w6: RN17.5@6544.1,6214.29 6571.42,6214.29 6614.66,6171.05 6614.66,6053.02 6669.66,5998.02 6669.66,5881.96 6684.57,5867.05 U10.16@6758.66,5867.05
D5: RN17.6 U10.15 | length 616.3
  Bottom Layer w6: RN17.6@6544.1,6182.8 6572.91,6182.8 6602.66,6153.05 6602.66,6048.05 6657.66,5993.05 6657.66,5876.99 6717.6,5817.05 6808.66,5817.05 U10.15@6858.66,5867.05
D6: RN16.7 U10.18 | length 492.6
  Bottom Layer w6: RN16.7@6544.1,6351.3 6568.89,6351.3 6650.66,6269.53 6650.66,6066.56 6750.18,5967.05 U10.18@6758.66,5967.05
D7: RN16.8 U10.17 | length 653
  Bottom Layer w6: RN16.8@6544.1,6319.81 6573.41,6319.81 6638.66,6254.56 6638.66,6061.59 6700.66,5999.59 6700.66,5935.05 6718.66,5917.05 6808.66,5917.05 U10.17@6858.66,5967.05
DIP0: RN10.8 SW1.16 | length 527.7
  Bottom Layer w10: SW1.16@3683.16,4966.95 4015.5,5299.29 RN10.8@4073.23,5299.29
DIP1: RN10.7 SW1.15 | length 595.6
  Bottom Layer w10: SW1.15@3683.16,4866.95 3743.66,4927.45 3743.66,4994.82 4016.64,5267.8 RN10.7@4073.23,5267.8
DIP2: RN10.6 SW1.14 | length 663.4
  Bottom Layer w10: SW1.14@3683.16,4766.95 3764.66,4848.45 3764.66,4983.19 4017.77,5236.3 RN10.6@4073.23,5236.3
DIP3: RN10.5 SW1.13 | length 731.3
  Bottom Layer w10: SW1.13@3683.16,4666.95 3785.66,4769.45 3785.66,4971.57 4018.9,5204.81 RN10.5@4073.23,5204.81
DIP4: RN9.8 SW1.12 | length 729.8
  Bottom Layer w10: SW1.12@3683.36,4567.45 3806.66,4690.75 3806.66,4894.94 4011.01,5099.29 RN9.8@4073.23,5099.29
DIP5: RN9.7 SW1.11 | length 797.6
  Bottom Layer w10: SW1.11@3684.16,4467.15 3827.66,4610.65 3827.66,4883.31 4012.15,5067.8 RN9.7@4073.23,5067.8
DIP6: RN9.6 SW1.10 | length 865.4
  Bottom Layer w10: SW1.10@3684.16,4367.15 3848.66,4531.65 3848.66,4871.68 4013.28,5036.3 RN9.6@4073.23,5036.3
DIP7: RN9.5 SW1.9 | length 933.3
  Bottom Layer w10: SW1.9@3684.16,4267.15 3869.66,4452.65 3869.66,4860.06 4014.41,5004.81 RN9.5@4073.23,5004.81
GND: C24.2 C32.1 C33.2 CARD1.2 CARD1.3 CARD1.6 CARD1.11 CARD1.12 CARD1.13 CARD1.14 CARD1.15 CN1.9 CN1.18 CN2.1 DC1.2 DC1.3 H5.45 H6.45 H6.46 KEY1.1 LED5.1 LED6.1 LED7.1 LED8.1 LED9.1 LED10.1 LED11.1 LED12.1 LED13.1 R22.1 R23.1 R24.2 R25.2 R26.2 R27.2 R28.2 R32.2 R33.2 R39.1 S1.2 S1.4 S1.7 S1.8 S1.9 SW1.1 SW1.2 SW1.3 SW1.4 SW1.5 SW1.6 SW1.7 SW1.8 TF1.3 TF1.6 TF1.10 TF1.11 TF1.12 TF1.13 U10.22 U11.19 U11.20 U12.5 U12.6 U12.7 U12.8 U12.10 U13.4 U18.4 USB1.4 USB1.8 USB1.9 X1.3 | length 931.7
  Top Layer w20: 5111.16,3744.55 5167.46,3744.55 U12.5@5167.91,3745 ; 5138.66,3669.55 5210.49,3669.55 U12.10@5212.99,3667.05 ; U12.8@5393.32,3667.05 U12.7@5483.46,3667.05 U12.6@5573.62,3667.05 5658.66,3667.05 ; X1.3@6735.67,6991.05 6735.67,7067.05
  Top Layer w66.93: 6108.66,3547.05 6237.28,3547.05 DC1.2@6239.18,3548.94 6428.15,3548.94 DC1.3@6428.15,3686.73
  other v1: 3558.66,3854.55 3608.66,3854.55 3658.66,3854.55 3708.66,3854.55 3758.66,3854.55 3808.66,3854.55 3858.66,3854.55 3908.66,3854.55 3958.66,3854.55 4008.66,3854.55 4058.66,3854.55 4108.66,3854.55 4158.66,3854.55 4208.66,3854.55 4258.66,3854.55 4308.66,3854.55 4408.66,3854.55 4483.66,3854.55 4533.66,3854.55 4583.66,3854.55 4633.66,3854.55 4683.66,3854.55 4733.66,3854.55 4783.66,3854.55 4833.66,3854.55 4883.66,3854.55 4933.66,3854.55 4983.66,3854.55 5158.66,3904.55 5358.66,3904.55 5458.66,3904.55 5658.66,3904.55 5758.66,3904.55 6958.66,3929.55 7196.16,3929.55 5158.66,3954.55 5358.66,3954.55 5458.66,3954.55 5658.66,3954.55 5758.66,3954.55 6958.66,3979.55 7196.16,3979.55 5158.66,4004.55 5358.66,4004.55 5458.66,4004.55 5658.66,4004.55 5758.66,4004.55 6958.66,4029.55 7196.16,4029.55 5158.66,4054.55 5358.66,4054.55 5458.66,4054.55 5658.66,4054.55 5758.66,4054.55 6958.66,4079.55 7196.16,4079.55 5158.66,4104.55 5358.66,4104.55 5458.66,4104.55 5658.66,4104.55 5758.66,4104.55 6958.66,4129.55 7196.16,4129.55 5358.66,4154.55 5458.66,4154.55 5658.66,4154.55 5758.66,4154.55 6958.66,4179.55 7196.16,4179.55 5158.66,4204.55 5358.66,4204.55 5458.66,4204.55 5658.66,4204.55 5758.66,4204.55 6958.66,4229.55 7196.16,4229.55 5158.66,4254.55 5358.66,4254.55 5458.66,4254.55 5658.66,4254.55 5758.66,4254.55 6958.66,4279.55 7196.16,4279.55 6958.66,4329.55 7196.16,4329.55 6958.66,4379.55 7196.16,4379.55 6958.66,4429.55 7196.16,4429.55 6958.66,4479.55 7196.16,4479.55 6958.66,4529.55 7196.16,4529.55 6958.66,4579.55 7196.16,4579.55 6958.66,4629.55 7196.16,4629.55 6958.66,4679.55 7196.16,4679.55 6958.66,4729.55 7196.16,4729.55 6958.66,4779.55 7196.16,4779.55 6958.66,4829.55 7196.16,4829.55 5971.16,4867.05 6033.66,4867.05 6958.66,4879.55 7196.16,4879.55 5971.16,4917.05 6033.66,4917.05 6958.66,4929.55 7196.16,4929.55 5971.16,4967.05 6033.66,4967.05 6958.66,4979.55 7196.16,4979.55 6004.66,5006.05 6958.66,5029.55 7196.16,5029.55 3358.66,5042.05 4583.66,5042.05 4633.66,5042.05 4683.66,5042.05 4733.66,5042.05 4783.66,5042.05 4833.66,5042.05 4883.66,5042.05 4933.66,5042.05 4983.66,5042.05 5033.66,5042.05 5083.66,5042.05 5133.66,5042.05 5183.66,5042.05 5233.66,5042.05 5283.66,5042.05 5333.66,5042.05 5383.66,5042.05 5433.66,5042.05 5483.66,5042.05 5533.66,5042.05 5583.66,5042.05 5633.66,5042.05 5683.66,5042.05 5733.66,5042.05 5783.66,5042.05 5833.66,5042.05 5896.16,5054.55 3358.66,5067.05 6958.66,5079.55 7196.16,5079.55 3358.66,5092.05 4583.66,5092.05 5958.66,5092.05 6058.66,5092.05 6146.16,5092.05 3358.66,5117.05 6958.66,5129.55 7196.16,5129.55 3358.66,5142.05 4583.66,5142.05 5958.66,5142.05 6058.66,5142.05 6146.16,5142.05 3358.66,5167.05 6958.66,5179.55 7196.16,5179.55 3358.66,5192.05 4583.66,5192.05 5958.66,5192.05 6058.66,5192.05 6146.16,5192.05 3358.66,5217.05 6958.66,5229.55 7196.16,5229.55 3358.66,5242.05 4583.66,5242.05 5958.66,5242.05 6058.66,5242.05 6146.16,5242.05 3358.66,5267.05 6958.66,5279.55 7196.16,5279.55 3358.66,5292.05 5958.66,5292.05 6058.66,5292.05 6146.16,5292.05 3358.66,5317.05 6958.66,5329.55 7196.16,5329.55 3358.66,5342.05 5958.66,5342.05 6096.16,5342.05 6146.16,5342.05 3358.66,5367.05 6958.66,5379.55 7196.16,5379.55 3358.66,5392.05 4583.66,5392.05 5958.66,5392.05 6146.16,5392.05 3358.66,5417.05 6008.66,5417.05 6958.66,5429.55 7196.16,5429.55 3358.66,5442.05 4583.66,5442.05 6058.66,5442.05 6146.16,5442.05 6958.66,5479.55 7196.16,5479.55 4583.66,5492.05 6058.66,5492.05 6146.16,5492.05 6958.66,5529.55 7196.16,5529.55 4583.66,5542.05 5958.66,5542.05 6058.66,5542.05 6146.16,5542.05 6958.66,5579.55 7196.16,5579.55 4583.66,5592.05 4633.66,5592.05 4683.66,5592.05 4733.66,5592.05 4783.66,5592.05 4833.66,5592.05 4883.66,5592.05 4933.66,5592.05 4983.66,5592.05 5033.66,5592.05 5083.66,5592.05 5133.66,5592.05 5183.66,5592.05 5233.66,5592.05 5283.66,5592.05 5383.66,5592.05 5433.66,5592.05 5483.66,5592.05 5533.66,5592.05 5583.66,5592.05 5633.66,5592.05 5683.66,5592.05 5733.66,5592.05 5783.66,5592.05 5833.66,5592.05 5883.66,5592.05 5933.66,5592.05 5958.66,5592.05 6058.66,5592.05 6146.16,5592.05 6958.66,5629.55 7196.16,5629.55 4583.66,5642.05 5958.66,5642.05 6058.66,5642.05 6146.16,5642.05 6958.66,5679.55 7196.16,5679.55 4583.66,5692.05 5958.66,5692.05 6058.66,5692.05 6146.16,5692.05 6958.66,5729.55 7196.16,5729.55 4583.66,5742.05 5958.66,5742.05 6058.66,5742.05 6146.16,5742.05 6958.66,5779.55 7196.16,5779.55 4583.66,5792.05 5958.66,5792.05 6058.66,5792.05 6146.16,5792.05 6958.66,5829.55 7196.16,5829.55 4583.66,5842.05 5958.66,5842.05 6058.66,5842.05 6146.16,5842.05 6958.66,5879.55 7196.16,5879.55 4583.66,5892.05 5958.66,5892.05 6058.66,5892.05 6146.16,5892.05 6958.66,5929.55 7196.16,5929.55 4583.66,5942.05 5958.66,5942.05 6058.66,5942.05 6146.16,5942.05 6958.66,5979.55 7196.16,5979.55 4583.66,5992.05 5958.66,5992.05 6058.66,5992.05 6146.16,5992.05 6958.66,6029.55 7196.16,6029.55 4583.66,6042.05 5958.66,6042.05 6058.66,6042.05 6146.16,6042.05 4621.16,6079.55 6958.66,6079.55 7196.16,6079.55 5958.66,6092.05 6058.66,6092.05 6146.16,6092.05 4658.66,6117.05 6958.66,6129.55 7196.16,6129.55 5958.66,6142.05 6058.66,6142.05 6146.16,6142.05 4696.16,6154.55 4733.66,6167.05 4783.66,6167.05 4833.66,6167.05 4883.66,6167.05 4933.66,6167.05 4983.66,6167.05 5033.66,6167.05 5083.66,6167.05 5133.66,6167.05 5183.66,6167.05 5233.66,6167.05 5283.66,6167.05 5333.66,6167.05 5383.66,6167.05 5533.66,6167.05 5583.66,6167.05 5633.66,6167.05 5683.66,6167.05 5733.66,6167.05 5783.66,6167.05 5833.66,6167.05 5883.66,6167.05 5933.66,6167.05 6958.66,6179.55 7196.16,6179.55 5958.66,6192.05 6058.66,6192.05 6146.16,6192.05 5958.66,6242.05 6058.66,6242.05 6146.16,6242.05 5958.66,6292.05 6058.66,6292.05 6146.16,6292.05 5958.66,6342.05 6058.66,6342.05 5958.66,6392.05 6058.66,6392.05 6146.16,6442.05 5958.66,6492.05 6058.66,6492.05 6146.16,6492.05 4933.66,6514.55 4958.66,6514.55 4983.66,6514.55 5008.66,6514.55 5033.66,6514.55 5058.66,6514.55 5958.66,6542.05 6058.66,6542.05 6146.16,6542.05 5958.66,6592.05 6058.66,6592.05 6146.16,6592.05 4108.66,6929.55 4158.66,6929.55 4208.66,6929.55 4258.66,6929.55 4308.66,6929.55 4358.66,6929.55 4408.66,6929.55 4458.66,6929.55 4508.66,6929.55 4558.66,6929.55 4608.66,6929.55 4658.66,6929.55 4708.66,6929.55 4758.66,6929.55 4808.66,6929.55 4858.66,6929.55 4908.66,6929.55 4958.66,6929.55 5008.66,6929.55 5058.66,6929.55 5108.66,6929.55 5158.66,6929.55 5208.66,6929.55 5258.66,6929.55 5308.66,6929.55 5358.66,6929.55 5408.66,6929.55 5458.66,6929.55 5508.66,6929.55 5558.66,6929.55 5608.66,6929.55 5658.66,6929.55 5708.66,6929.55 5808.66,6929.55 5858.66,6929.55 5908.66,6929.55 5958.66,6929.55 6008.66,6929.55 6058.66,6929.55 6108.66,6929.55 6158.66,6929.55 6208.66,6929.55 6258.66,6929.55 6308.66,6929.55 6358.66,6929.55 6408.66,6929.55 6458.66,6929.55 6508.66,6929.55 6558.66,6929.55 3383.66,7242.05 3433.66,7242.05 3483.66,7242.05 3533.66,7242.05 3583.66,7242.05 3633.66,7242.05 3683.66,7242.05 3733.66,7242.05 3783.66,7242.05 3833.66,7242.05 3883.66,7242.05 3933.66,7242.05 3983.66,7242.05 4033.66,7242.05 4083.66,7242.05 4133.66,7242.05 4183.66,7242.05 4433.66,7242.05 4483.66,7242.05 4533.66,7242.05 4583.66,7242.05 4633.66,7242.05 4683.66,7242.05 4733.66,7242.05 4783.66,7242.05 4833.66,7242.05 4883.66,7242.05 4933.66,7242.05 4983.66,7242.05 5033.66,7242.05 5083.66,7242.05 5133.66,7242.05 5183.66,7242.05 5233.66,7242.05 5283.66,7242.05 5333.66,7242.05 5383.66,7242.05 5433.66,7242.05 5483.66,7242.05 5533.66,7242.05 5583.66,7242.05 5633.66,7242.05 5683.66,7242.05 5733.66,7242.05 5783.66,7242.05 5833.66,7242.05 5883.66,7242.05 6033.66,7242.05 6083.66,7242.05 6133.66,7242.05 6183.66,7242.05 6233.66,7242.05 6283.66,7242.05 6433.66,7242.05 6483.66,7242.05 6533.66,7242.05 6583.66,7242.05 6633.66,7242.05 6683.66,7242.05 6733.66,7242.05 6783.66,7242.05 6833.66,7242.05 6883.66,7242.05 6933.66,7242.05 6983.66,7242.05 7033.66,7242.05 7083.66,7242.05 7133.66,7242.05 7183.66,7242.05
HSYNC: RN6.6 U12.13 | length 2140.6
  Top Layer w6: U12.13@5348.23,3589.1 5348.66,3588.67 v1(5348.66,3507.05)
  Bottom Layer w6: RN6.6@4073.23,4436.3 4047.91,4436.3 4037.66,4426.05 4037.66,4326.99 4094.6,4270.05 4779.6,4270.05 5042.66,4006.99 5042.66,3548.05 5073.66,3517.05 5338.66,3517.05 v1(5348.66,3507.05)
INT: RN24.8 U9.9 | length 651.5
  Bottom Layer w6: RN24.8@6544.1,4719.81 6570.9,4719.81 6579.69,4711.02 6579.69,4636.02 6643.66,4572.05 6643.66,4456.59 6704.66,4395.59 6704.66,4331.05 6718.66,4317.05 6808.66,4317.05 U9.9@6858.66,4367.05
IO0: CN1.1 RN1.5 RN15.8 | length 865.3
  Bottom Layer w6: CN1.1@3668.5,6035.16 3810.39,6177.05 3936.84,6177.05 3999.58,6239.79 3999.58,6352.97 4045.9,6399.29 RN15.8@4073.23,6399.29
  Bottom Layer w10: RN1.5@3444.1,5989.29 3489.97,6035.16 CN1.1@3668.5,6035.16
IO1: CN1.6 RN1.6 RN15.7 | length 893.4
  Bottom Layer w6: CN1.6@3556.7,5980.63 3691.98,5980.63 3713.4,6002.05 3713.4,6063.08 3815.36,6165.05 3941.81,6165.05 4011.58,6234.82 4011.58,6334.97 4044.41,6367.8 RN15.7@4073.23,6367.8
  Bottom Layer w10: RN1.6@3444.1,5957.8 3533.86,5957.8 CN1.6@3556.7,5980.63
IO2: CN1.2 RN1.7 RN15.6 | length 894.8
  Bottom Layer w6: CN1.2@3668.51,5926.1 3668.5,5940.18 3725.4,5997.08 3725.4,6058.11 3820.34,6153.05 3946.78,6153.05 4023.58,6229.85 4023.58,6316.97 4043.66,6337.05 4072.48,6337.05 RN15.6@4073.23,6336.3
  Bottom Layer w10: RN1.7@3444.1,5926.3 3668.3,5926.3 CN1.2@3668.51,5926.1
IO3: CN1.7 RN1.8 RN15.5 | length 928
  Bottom Layer w6: CN1.7@3556.69,5871.58 3696.06,5871.58 3737.4,5912.92 3737.4,6053.14 3825.31,6141.05 3951.75,6141.05 4035.58,6224.88 4035.58,6272.16 4068.23,6304.81 RN15.5@4073.23,6304.81
  Bottom Layer w10: RN1.8@3444.1,5894.81 3467.33,5871.58 CN1.7@3556.69,5871.58
IO4: CN1.3 RN3.5 RN14.8 | length 887
  Bottom Layer w6: CN1.3@3668.5,5817.05 3668.5,5827.05 3749.4,5907.94 3749.4,6048.17 3830.28,6129.05 3956.72,6129.05 4026.96,6199.29 RN14.8@4073.23,6199.29
  Bottom Layer w10: RN3.5@3444.1,5789.29 3471.86,5817.05 CN1.3@3668.5,5817.05
IO5: CN1.8 RN3.6 RN14.7 | length 928
  Bottom Layer w6: CN1.8@3556.7,5762.52 3701.06,5762.52 3761.4,5822.86 3761.4,6043.2 3835.25,6117.05 3961.69,6117.05 4012.44,6167.8 RN14.7@4073.23,6167.8
  Bottom Layer w10: RN3.6@3444.1,5757.8 3551.97,5757.8 CN1.8@3556.7,5762.52
IO6: CN1.4 RN3.7 RN14.6 | length 946.1
  Bottom Layer w6: CN1.4@3668.51,5707.99 3668.5,5712.99 3773.4,5817.89 3773.4,6038.23 3840.22,6105.05 3966.66,6105.05 3997.91,6136.3 RN14.6@4073.23,6136.3
  Bottom Layer w10: RN3.7@3444.1,5726.3 3493.66,5726.3 3511.97,5707.99 CN1.4@3668.51,5707.99
IO7: CN1.10 RN4.1 RN14.5 | length 721.8
  Top Layer w10: v1(3688.66,6189.29) 3842.79,6035.16 CN1.10@3934.64,6035.16
  Bottom Layer w10: RN4.1@3444.1,6189.29 v1(3688.66,6189.29) ; CN1.10@3934.64,6035.16 4004.29,6104.81 RN14.5@4073.23,6104.81
IO8: CN1.15 RN4.2 RN13.8 | length 735.4
  Top Layer w10: v1(3688.66,6157.8) 3777.83,6068.63 3777.83,6025.63 CN1.15@3822.84,5980.63
  Bottom Layer w10: RN4.2@3444.1,6157.8 v1(3688.66,6157.8) ; CN1.15@3822.84,5980.63 3824.25,5982.05 3993.66,5982.05 4010.9,5999.29 RN13.8@4073.23,5999.29
IO9: CN1.11 RN4.3 RN13.7 | length 784.5
  Top Layer w10: v1(3688.66,6126.3) 3753.66,6061.3 3753.66,5967.05 3793.66,5927.05 3933.69,5927.05 CN1.11@3934.65,5926.1
  Bottom Layer w10: RN4.3@3444.1,6126.3 v1(3688.66,6126.3) ; CN1.11@3934.65,5926.1 3984.64,5926.1 4026.34,5967.8 RN13.7@4073.23,5967.8
IO10: CN1.16 RN4.4 RN13.6 | length 803.5
  Top Layer w10: v1(3688.66,6094.81) 3728.66,6054.81 3728.66,5960.75 3817.83,5871.58 CN1.16@3822.83,5871.58
  Bottom Layer w10: RN4.4@3444.1,6094.81 v1(3688.66,6094.81) ; CN1.16@3822.83,5871.58 3823.3,5872.05 3983.66,5872.05 4047.91,5936.3 RN13.6@4073.23,5936.3
IO11: CN1.12 RN5.1 RN13.5 | length 902.7
  Bottom Layer w10: RN5.1@3444.1,5589.29 3576.42,5589.29 3628.66,5537.05 3688.66,5537.05 3723.66,5572.05 3723.66,5742.05 3798.66,5817.05 CN1.12@3934.64,5817.05 3980.47,5817.05 4068.23,5904.81 RN13.5@4073.23,5904.81
IO12: CN1.17 R2.1 RN5.2 | length 880.4
  Bottom Layer w10: RN5.2@3444.1,5557.8 3567.91,5557.8 3613.66,5512.05 3703.66,5512.05 3743.66,5552.05 3743.66,5708.35 3797.83,5762.52 CN1.17@3822.84,5762.52 3823.3,5762.05 3973.66,5762.05 4048.66,5837.05 R2.1@4079,5837.05
IO13: CN1.13 R1.1 RN5.3 | length 843.7
  Bottom Layer w10: RN5.3@3444.1,5526.3 3564.41,5526.3 3603.66,5487.05 3713.66,5487.05 3763.66,5537.05 3763.66,5677.05 3794.6,5707.99 CN1.13@3934.65,5707.99 3974.64,5707.99 4034.45,5767.8 R1.1@4073.23,5767.8
IO/1: H6.41 RN15.1 | length 217.6
  Bottom Layer w10: RN15.1@4144.1,6399.29 4161.86,6417.05 4283.66,6417.05 H6.41@4333.66,6367.05
IO/2: H6.42 RN15.2 | length 89.9
  Bottom Layer w10: RN15.2@4144.1,6367.8 4232.91,6367.8 H6.42@4233.66,6367.05
IO/3: H6.39 RN15.3 | length 218.2
  Bottom Layer w10: RN15.3@4144.1,6336.3 4174.41,6336.3 4193.66,6317.05 4283.66,6317.05 H6.39@4333.66,6267.05
IO/4: H6.40 RN15.4 | length 105.2
  Bottom Layer w10: RN15.4@4144.1,6304.81 4181.86,6267.05 H6.40@4233.66,6267.05
IO/5: H6.37 RN14.1 | length 217.6
  Bottom Layer w10: RN14.1@4144.1,6199.29 4161.86,6217.05 4283.66,6217.05 H6.37@4333.66,6167.05
IO/6: H6.38 RN14.2 | length 89.9
  Bottom Layer w10: RN14.2@4144.1,6167.8 4232.91,6167.8 H6.38@4233.66,6167.05
IO/7: H6.35 RN14.3 | length 218.2
  Bottom Layer w10: RN14.3@4144.1,6136.3 4174.41,6136.3 4193.66,6117.05 4283.66,6117.05 H6.35@4333.66,6067.05
IO/8: H6.36 RN14.4 | length 105.2
  Bottom Layer w10: RN14.4@4144.1,6104.81 4181.86,6067.05 H6.36@4233.66,6067.05
IO/11: H6.33 RN13.1 | length 217.6
  Bottom Layer w10: RN13.1@4144.1,5999.29 4161.86,6017.05 4283.66,6017.05 H6.33@4333.66,5967.05